# Altium PCB Main.PcbDoc (part 4 of 4)
Units mm, origin at the board's own origin, x right, y up, seen from the top; angles counter-clockwise.
Board outline 180 x 80 mm, 4 copper layers (L1_TOP, L2_GND, L3_PWR, L4_BOT), stack 1.447 mm thick; 236 components, 173 nets, 792 pads, 473 vias.
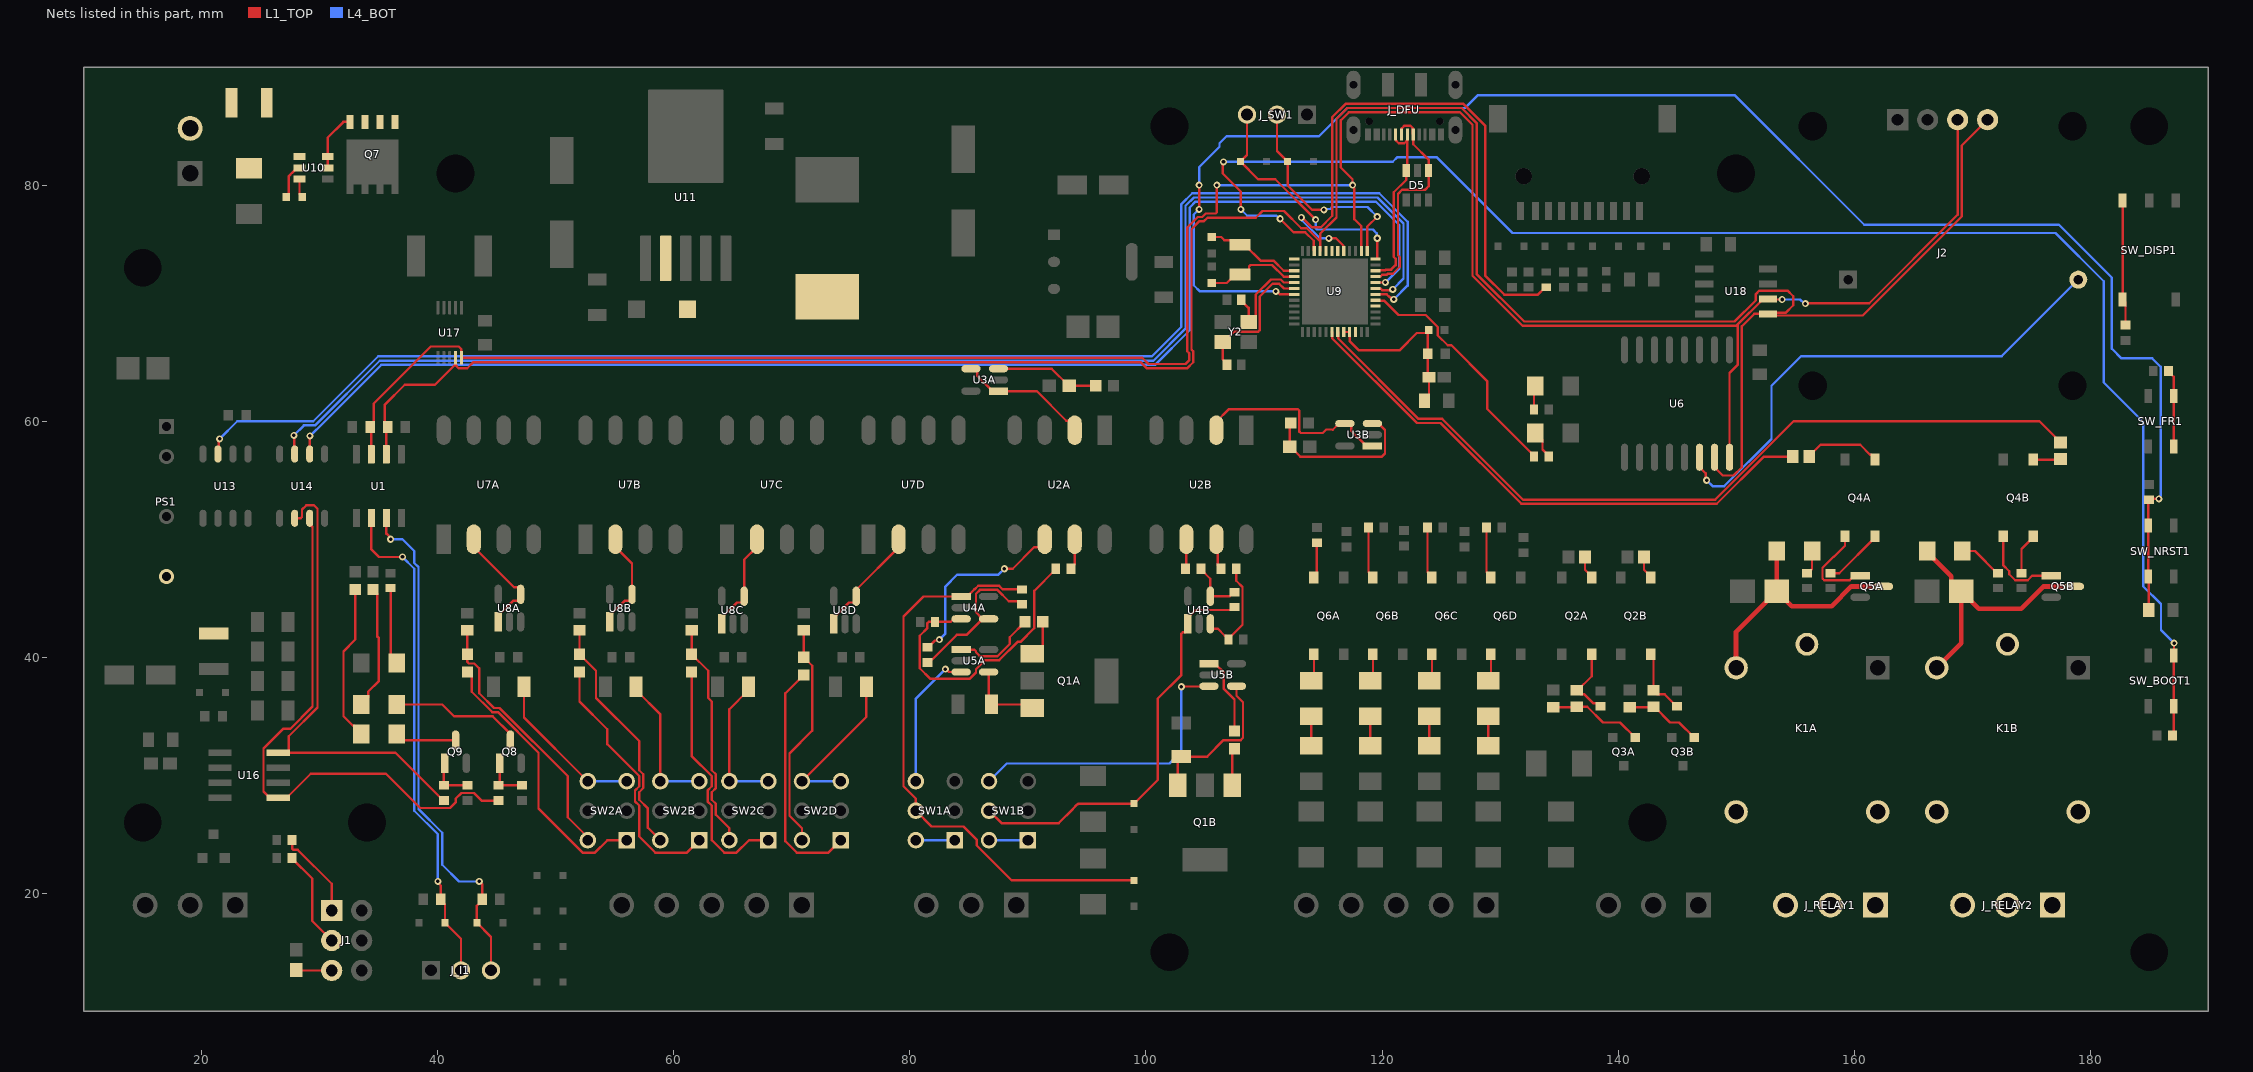
[diagram p5: the nets of this part, all layers, seen from the top]

## Via types
v1: diameter 0.6, hole 0.3, L1_TOP to L4_BOT, 473 vias

## Nets (pads, with @x,y where several pads share a name; then routed paths per layer and width w, separated by ;. In a path a pad name is that pad's centre, name@x,y a point inside that pad or via, vN(x,y) a via of type N, cw(c..) or ccw(c..) an arc to the next point about the centre after c; other vN are vias at no path point) (continued)
I2C_SCL: J2.3 R4.1 U1.3 U6.16 U9.38 U17.5 U18.6 | length 207.1
  L1_TOP w0.2: U1.3@34.365,57.2 34.365,59.385 R4.1@34.25,59.5 34.55,59.8 34.55,61.477 39.401,66.328 41.766,66.328 41.975,66.119 41.975,65.4 U17.5@42,65.375 99.675,65.375 100.204,64.846 103.359,64.846 103.654,65.141 103.654,65.771 103.5,65.925 103.5,76.41 104.392,77.302 104.771,77.302 105.065,77.596 105.883,77.596 106,77.713 v1(106,80) ; U9.38@118.25,74.435 118.25,76.52 117.647,77.123 117.647,79.744 117.5,79.892 117.5,80.5 116.5,81.5 116.5,85.493 117.194,86.187 126.606,86.187 127.668,85.126 127.668,72.332 131.903,68.097 150.047,68.097 150.132,68.182 ; U6.16@149.445,57.8 149.445,64.087 150.132,64.774 150.132,68.182 ; v1(153.896,70.313) 152.263,70.313 150.132,68.182 ; v1(155.878,69.967) 155.91,70 161.278,70 168.77,77.492 J2.3@168.77,85.55
  L4_BOT w0.2: v1(106,80) v1(117.5,80) ; v1(153.896,70.313) 155.424,70.313 155.769,69.967 v1(155.878,69.967)
I2C_SDA: J2.4 R3.1 U1.2 U6.15 U9.45 U17.4 U18.5 | length 217.4
  L1_TOP w0.2: U1.2@35.635,57.2 R3.1@35.635,59.385 ; R3.1@35.75,59.5 35.507,59.743 35.507,61.411 37.186,63.091 39.756,63.091 41.475,64.81 41.475,65.35 U17.4@41.5,65.375 ; U17.4@41.525,64.812 41.525,64.72 41.756,64.489 42.489,64.489 43.009,65.009 99.533,65.009 100.046,64.496 103.509,64.496 104.004,64.991 104.004,65.916 103.85,66.07 103.85,76.265 104.537,76.952 104.916,76.952 105.21,77.246 109.305,77.246 109.871,77.812 111.688,77.812 113.15,76.35 113.645,76.35 113.995,76 114,76 114.75,75.25 U9.45@114.75,74.435 ; 114.767,75.25 114.767,75.893 116.139,77.265 116.139,85.627 117.049,86.537 126.751,86.537 128.018,85.271 128.018,72.477 132.048,68.447 149.877,68.447 151.675,70.244 151.675,70.769 151.97,71.064 154.36,71.064 154.84,70.584 154.84,69.822 154.218,69.2 152.805,69.2 U18.5@152.7,69.095 ; U6.15@148.175,56.95 148.175,56.1 148.873,55.402 149.781,55.402 150.482,56.103 150.482,68.037 151.54,69.095 U18.5@152.7,69.095 ; J2.4@171.31,85.55 169.123,83.363 169.123,77.35 160.727,68.954 152.841,68.954 U18.5@152.7,69.095
NetBT1_2: BT1.2 U6.14 | length 43.8
  L1_TOP w0.2: U6.14@146.905,56.95 146.905,56.1 147.423,55.582 147.423,55.077 v1(147.5,55)
  L4_BOT w0.2: v1(147.5,55) 148,54.5 149,54.5 153,58.5 153,63 155.5,65.5 172.5,65.5 BT1.2@179,72
NetC5_1: C5.1 U9.3 Y1.1 | length 8.2
  L1_TOP w0.2: C5.1@105.582,75.613 106.369,75.613 106.637,75.345 107.575,75.345 Y1.1@107.975,74.945 108.375,74.945 109.735,73.585 110.834,73.585 111.669,72.75 U9.3@112.565,72.75
NetC6_1: C6.1 U9.4 Y1.2 | length 8.2
  L1_TOP w0.2: C6.1@105.582,71.713 106.843,71.713 107.575,72.445 108.326,72.445 108.726,72.845 108.726,73.118 108.843,73.235 110.689,73.235 111.674,72.25 U9.4@112.565,72.25
NetC7_1: C7.1 U9.5 Y2.3 | length 8.6
  L1_TOP w0.2: C7.1@108.073,70.296 108.073,70.221 108.692,69.602 Y2.3@108.692,68.421 108.792,68.421 109.292,68.921 109.292,70.712 110.584,72.004 111.425,72.004 111.679,71.75 U9.5@112.565,71.75
NetC8_2: C8.2 U9.6 Y2.1 | length 12
  L1_TOP w0.2: C8.2@106.873,64.796 106.873,64.871 106.492,65.252 Y2.1@106.492,66.721 106.592,66.721 107.442,67.571 109.495,67.571 109.642,67.717 109.642,70.567 110.729,71.654 111.28,71.654 111.684,71.25 U9.6@112.565,71.25
NetC16_1: C16.1 U10.5 | length 3
  L1_TOP w0.2: C16.1@27.15,79 27.375,79.225 27.375,80.779 27.663,81.067 27.667,81.067 28.067,81.467 U10.5@28.267,81.467
NetC16_2: C16.2 U10.6 | length 1.6
  L1_TOP w0.2: U10.6@28.267,80.517 28.267,79.258 28.5,79.025 C16.2@28.5,79
NetD1A_1: D1A.1 R21A.1 SW1A.5 U4A.1 | length 49.4
  L1_TOP w0.2: R21A.1@89.5,45.75 87.862,45.75 87.553,46.059 85.78,46.059 85.471,45.75 85.444,45.75 84.844,45.15 U4A.1@84.334,45.15 81.15,45.15 79.446,43.446 79.446,29.063 80.5,28.009 SW1A.5@80.5,27 81.837,25.663 84.538,25.663 85.646,24.555 85.646,24.063 88.609,21.1 D1A.1@99,21.1
NetD1B_1: D1B.1 R21B.1 SW1B.5 U4B.1 | length 35.5
  L1_TOP w0.2: SW1B.5@86.7,27 87.754,25.946 92.612,25.946 93.81,27.144 93.81,27.169 94.161,27.52 94.187,27.52 94.266,27.6 D1B.1@99,27.6 101,29.6 101,36.5 103,38.5 103,41.997 103.117,42.115 103.341,42.115 103.55,42.324 103.55,43.344 104.206,44 107.25,44 R21B.1@107.5,44.25
NetD8_2: D8.2 R18.2 | length 2.1
  L1_TOP w0.2: R18.2@132.875,61 132.875,62.875 D8.2@133,63
NetD9_2: D9.2 R20.2 | length 2.5
  L1_TOP w0.2: D9.2@133,59 133.6,58.4 133.6,57.6 134.125,57.075 R20.2@134.125,57
NetD10_1: D10.1 F1.2 Q7.1 Q7.2 Q7.3 U10.4
NetD12_1: D12.1 L1.1 U11.2
NetD17A_2: D17A.2 D22A.1 K1A.A2 Q5A.3 | length 21.6
  L1_TOP w0.4: K1A.A2@150,39.1 150,42.15 152.6,44.75 152.6,44.8 153.4,45.6 D17A.2@153.45,45.6 153.45,48.988 D22A.1@153.438,49 ; D17A.2@153.5,45.6 154.3,44.8 154.3,44.75 154.723,44.327 158.105,44.327 159.779,46 Q5A.3@162.477,46
NetD17B_2: D17B.2 D22B.1 K1B.A2 Q5B.3 | length 23
  L1_TOP w0.4: D22B.1@166.182,49 166.182,48.9 168.232,46.85 168.232,46.4 169.032,45.6 D17B.2@169.082,45.6 ; K1B.A2@167,39.1 169.082,41.182 D17B.2@169.082,45.6 ; Q5B.3@178.659,46 176.053,46 174.158,44.105 170.577,44.105 D17B.2@169.082,45.6
NetD19_2: D19.2 R41.2 | length 6.6
  L1_TOP w0.2: R41.2@36,45.875 36,40 D19.2@36.5,39.5
NetD20_1: D20.1 Q8.3 | length 11.2
  L1_TOP w0.2: D20.1@36.5,36 40.367,36 41.367,35 44.633,35 46.14,33.493 Q8.3@46.14,32.977
NetD20_2: D20.2 R46.2 | length 10.6
  L1_TOP w0.2: D20.2@33.5,36 34.1,36.6 34.1,37.1 35,38 35,41.625 34.875,41.75 34.875,45.375 R46.2@34.5,45.75
NetD21_1: D21.1 Q9.3 | length 5.2
  L1_TOP w0.2: D21.1@36.5,33.5 37.023,32.977 Q9.3@41.5,32.977
NetD21_2: D21.2 R47.2 | length 13.3
  L1_TOP w0.2: R47.2@33,45.75 33,41.5 32,40.5 32,35 32.8,34.2 32.9,34.2 33.5,33.6 D21.2@33.5,33.5
NetD22A_2: D22A.2 R52A.1 | length 2.1
  L1_TOP w0.2: R52A.1@156,47.125 156.075,47.125 156.438,47.488 D22A.2@156.438,49
NetD22B_2: D22B.2 R52B.1 | length 3.8
  L1_TOP w0.2: D22B.2@169.182,49 170.232,49 172.107,47.125 R52B.1@172.182,47.125
NetF1_1: F1.1 J-SUPPLY1.2
NetF2_1: F2.1 PS1.7
NetJ1_1: J1.1 R23.1 | length 7.6
  L1_TOP w0.2: R23.1@27.65,24.5 27.65,23.792 27.767,23.675 28.129,23.675 31,20.804 J1.1@31,18.54
NetJ1_3: J1.3 R24.1 | length 8.4
  L1_TOP w0.2: R24.1@27.65,23 27.65,22.95 29.35,21.25 29.35,17.65 J1.3@31,16
NetJ1_5: J1.5 R25.2 | length 3
  L1_TOP w0.2: R25.2@28,13.5 28.04,13.46 J1.5@31,13.46
NetJ_RELAY1_1: J_RELAY1.1 K1A.COM
NetJ_RELAY1_2: J_RELAY1.2 K1A.NC
NetJ_RELAY1_3: J_RELAY1.3 K1A.NO
NetJ_RELAY2_1: J_RELAY2.1 K1B.COM
NetJ_RELAY2_2: J_RELAY2.2 K1B.NC
NetJ_RELAY2_3: J_RELAY2.3 K1B.NO
NetQ1A_1: Q1A.1 R7A.2 | length 3.2
  L1_TOP w0.2: Q1A.1@90.35,40.3 90.6,40.3 91.25,40.95 R7A.2@91.25,43
NetQ1A_3: Q1A.3 R10A.2 U5A.4 | length 6.4
  L1_TOP w0.2: U5A.4@86.666,38.75 86.666,36.259 R10A.2@86.925,36 90.05,36 Q1A.3@90.35,35.7
NetQ1B_1: Q1B.1 R7B.2 | length 3.2
  L1_TOP w0.2: Q1B.1@107.3,29.15 107.3,32.05 R7B.2@107.5,32.25
NetQ1B_3: Q1B.3 R10B.2 U5B.4 | length 13
  L1_TOP w0.2: Q1B.3@102.7,29.15 102.7,31.275 R10B.2@103,31.575 105.177,31.575 106.577,32.975 108.029,32.975 108.225,33.171 108.225,36.186 107.666,36.744 U5B.4@107.666,37.55
NetQ2A_1: Q2A.1 R12A.2 | length 2
  L1_TOP w0.2: R12A.2@137.2,48.5 137.2,47.42 137.77,46.85 Q2A.1@137.77,46.75
NetQ2A_4: Q2A.4 R11A.2 R13A.1 | length 6.2
  L1_TOP w0.2: Q2A.4@137.77,40.25 137.77,38.395 136.575,37.2 R13A.1@136.5,37.2 136.85,36.85 137.15,36.85 137.913,36.087 138.263,36.087 R11A.2@138.5,35.85
NetQ2B_1: Q2B.1 R12B.2 | length 2
  L1_TOP w0.2: R12B.2@142.2,48.5 142.2,47.42 142.77,46.85 Q2B.1@142.77,46.75
NetQ2B_4: Q2B.4 R11B.2 R13B.1 | length 5.7
  L1_TOP w0.2: Q2B.4@142.77,40.25 143,40.02 R13B.1@143,37.2 143.35,36.85 143.95,36.85 144.95,35.85 R11B.2@145,35.85
NetQ3A_1: Q3A.1 R13A.2 R40A.1 | length 8
  L1_TOP w0.2: R40A.1@134.5,35.775 136.475,35.775 R13A.2@136.5,35.8 137.396,35.8 138.721,34.475 140.175,34.475 Q3A.1@141.45,33.2
NetQ3B_1: Q3B.1 R13B.2 R40B.1 | length 6.5
  L1_TOP w0.2: R40B.1@141,35.775 142.975,35.775 R13B.2@143,35.8 ; R13B.2@143.075,35.8 144.4,34.475 145.175,34.475 Q3B.1@146.45,33.2
NetQ4A_1: Q4A.1 R35A.2 | length 6.6
  L1_TOP w0.2: R35A.2@156.2,57 156.2,57.05 157.15,58 160.52,58 161.37,57.15 161.47,57.15 161.77,56.85 Q4A.1@161.77,56.75
NetQ4A_3: Q4A.3 Q5A.1 | length 7.8
  L1_TOP w0.2: Q4A.3@159.23,50.25 159.23,49.45 158.294,48.514 158.261,48.514 157.325,47.579 157.325,46.671 157.471,46.525 159.617,46.525 160.007,46.915 Q5A.1@160.523,46.915
NetQ4A_4: Q4A.4 R34A.2 | length 5.1
  L1_TOP w0.2: R34A.2@158,47.125 158.745,47.125 161.77,50.15 Q4A.4@161.77,50.25
NetQ4B_1: Q4B.1 R35B.2 | length 2.4
  L1_TOP w0.2: Q4B.1@175.17,56.75 177.45,56.75 R35B.2@177.5,56.8
NetQ4B_3: Q4B.3 Q5B.1 | length 7.4
  L1_TOP w0.2: Q4B.3@172.63,50.25 172.63,47.806 173.142,47.294 173.142,47.037 173.654,46.525 174.711,46.525 175.101,46.915 Q5B.1@176.706,46.915
NetQ4B_4: Q4B.4 R34B.2 | length 3.5
  L1_TOP w0.2: R34B.2@174.182,47.125 174.182,49.162 175.17,50.15 Q4B.4@175.17,50.25
NetQ6A_1: Q6A.1 R38A.2 | length 2.3
  L1_TOP w0.2: R38A.2@114,38 114.23,38.23 Q6A.1@114.23,40.25
NetQ6A_4: Q6A.4 R39A.1 | length 3.1
  L1_TOP w0.2: Q6A.4@114.23,46.75 114.479,46.999 R39A.1@114.479,49.7
NetQ6B_1: Q6B.1 R38B.2 | length 2.3
  L1_TOP w0.2: R38B.2@119,38 119.23,38.23 Q6B.1@119.23,40.25
NetQ6B_4: Q6B.4 R39B.1 | length 4.4
  L1_TOP w0.2: R39B.1@118.85,51 118.85,47.23 119.23,46.85 Q6B.4@119.23,46.75
NetQ6C_1: Q6C.1 R38C.2 | length 2.3
  L1_TOP w0.2: R38C.2@124,38 124.23,38.23 Q6C.1@124.23,40.25
NetQ6C_4: Q6C.4 R39C.1 | length 4.4
  L1_TOP w0.2: R39C.1@123.85,51 123.85,47.23 124.23,46.85 Q6C.4@124.23,46.75
NetQ6D_1: Q6D.1 R38D.2 | length 2.3
  L1_TOP w0.2: R38D.2@129,38 129.23,38.23 Q6D.1@129.23,40.25
NetQ6D_4: Q6D.4 R39D.1 | length 4.4
  L1_TOP w0.2: R39D.1@128.85,51 128.85,47.23 129.23,46.85 Q6D.4@129.23,46.75
NetQ7_4: Q7.4 U10.2 U10.3 | length 5
  L1_TOP w0.2: U10.2@30.667,81.467 U10.3@30.667,82.417 30.667,84.042 31.988,85.363 Q7.4@32.559,85.363
NetQ8_1: Q8.1 R48.1 R50.2 | length 3.9
  L1_TOP w0.2: Q8.1@45.225,31.023 45.225,29.235 R48.1@45.14,29.15 R50.2@47.14,29.15
NetQ9_1: Q9.1 R49.1 R51.2 | length 3.9
  L1_TOP w0.2: Q9.1@40.585,31.023 40.5,30.938 R49.1@40.5,29.15 R51.2@42.5,29.15
NetR5A_2: R5A.2 R6A.1 U3A.3 | length 8.9
  L1_TOP w0.2: U3A.3@87.5,64.45 92,64.45 93.45,63 R5A.2@95.75,63
NetR5B_2: R5B.2 R6B.1 U3B.3 | length 13.8
  L1_TOP w0.2: R6B.1@112.167,57.853 112.167,59.753 R5B.2@112.267,59.853 ; R6B.1@112.217,57.853 113.07,57 120,57 120.253,57.253 120.253,59.244 119.694,59.803 U3B.3@119.183,59.803
NetR7A_1: R7A.1 U5A.1 | length 7.2
  L1_TOP w0.2: U5A.1@84.334,40.65 85.453,40.65 85.597,40.506 85.597,40.418 85.925,40.091 87.408,40.091 88.45,41.133 88.45,41.7 R7A.1@89.75,43
NetR7B_1: R7B.1 U5B.1 | length 6.9
  L1_TOP w0.2: U5B.1@105.334,39.45 105.844,39.45 106.597,38.697 106.597,37.318 107.5,36.416 R7B.1@107.5,33.75
NetR8A_1: R8A.1 U2A.7 | length 2.6
  L1_TOP w0.2: R8A.1@93.65,47.5 93.65,47.55 93.96,47.86 U2A.7@93.96,50
NetR8A_2: R8A.2 R22A.1 U4A.3 | length 24.9
  L1_TOP w0.2: U4A.3@84.334,43.25 83.711,43.25 83.461,43 R22A.1@82.125,43 81.592,43 81.475,42.883 81.475,42.471 80.825,41.821 80.825,39.071 81.705,38.191 85.075,38.191 85.597,38.713 85.597,38.982 86.357,39.741 87.553,39.741 89.112,41.3 89.354,41.3 90.525,42.471 90.525,45.625 92.35,47.45 R8A.2@92.35,47.5
NetR8B_1: R8B.1 U2B.7 | length 2.7
  L1_TOP w0.2: U2B.7@105.96,50 106.075,49.885 106.075,47.775 R8B.1@106.35,47.5
NetR8B_2: R8B.2 R22B.1 U4B.3 | length 8.9
  L1_TOP w0.2: U4B.3@105.45,42.834 105.45,42.617 105.643,42.424 106.076,42.424 106.675,41.825 106.75,41.825 R22B.1@107,41.575 ; R22B.1@107,41.5 R22B.1@107,41.575 ; R8B.2@107.65,47.5 107.65,46.479 108.175,45.954 108.175,42.75 R22B.1@107,41.575
NetR9A_1: R9A.1 U2A.6 | length 16.2
  L1_TOP w0.2: R9A.1@81.5,40.85 81.55,40.85 82.123,41.423 82.423,41.423 v1(82.5,41.5) ; v1(88,47.5) 88.704,47.5 90.52,49.316 90.958,49.316 91.42,49.778 U2A.6@91.42,50
  L4_BOT w0.2: v1(82.5,41.5) 83,42 83,46 84,47 87.5,47 v1(88,47.5)
NetR9A_2: R9A.2 R21A.2 U4A.4 | length 13.6
  L1_TOP w0.2: R9A.2@81.5,39.55 81.775,39.825 81.9,39.825 83.968,41.893 84.799,41.893 U4A.4@86.156,43.25 ; U4A.4@86.666,43.25 U4A.4@86.156,43.25 ; R21A.2@89.5,44.5 89.25,44.75 88.367,44.75 87.408,45.709 85.925,45.709 85.597,45.382 85.597,43.809 U4A.4@86.156,43.25
NetR9B_1: R9B.1 U2B.6 | length 2.5
  L1_TOP w0.2: R9B.1@103.35,47.5 103.42,47.57 U2B.6@103.42,50
NetR9B_2: R9B.2 R21B.2 U4B.4 | length 4.9
  L1_TOP w0.2: R9B.2@104.65,47.5 104.65,47.45 105.45,46.65 U4B.4@105.45,45.166 107.091,45.166 107.425,45.5 R21B.2@107.5,45.5
NetR14A_1: R14A.1 SW2A.1 | length 23.8
  L1_TOP w0.2: R14A.1@42.5,38.75 42.875,38.375 42.875,37.076 44.601,35.35 45.08,35.35 48.522,31.908 48.522,27.188 52.263,23.446 53.305,23.446 54.359,24.5 SW2A.1@56,24.5
NetR14A_2: R14A.2 R15A.2 SW2A.4 | length 22.6
  L1_TOP w0.2: R15A.2@42.5,42.275 R14A.2@42.5,40.25 42.5,39.592 42.617,39.475 43.079,39.475 43.5,39.054 43.5,36.946 44.746,35.7 45.225,35.7 51,29.925 51,26.444 52.7,24.744 SW2A.4@52.7,24.5
NetR14B_1: R14B.1 SW2B.1 | length 22.4
  L1_TOP w0.2: R14B.1@52,38.75 52,36.246 54.35,33.896 54.35,32.641 57.054,29.937 57.054,29.063 56.704,28.713 56.704,27.787 57.054,27.437 57.054,24.805 58.413,23.446 61.096,23.446 SW2B.1@62.15,24.5
NetR14B_2: R14B.2 R15B.2 SW2B.4 | length 20.9
  L1_TOP w0.2: R15B.2@52,42.275 R14B.2@52,40.25 53.4,38.85 53.4,36.546 57.054,32.892 57.054,30.432 57.404,30.082 57.404,28.918 57.054,28.568 57.054,27.932 57.796,27.19 57.796,25.554 SW2B.4@58.85,24.5
NetR14C_1: R14C.1 SW2C.1 | length 20.9
  L1_TOP w0.2: R14C.1@61.5,38.75 61.5,31.641 63.204,29.937 63.204,29.063 62.854,28.713 62.854,27.787 63.204,27.437 63.204,24.505 64.263,23.446 65.305,23.446 66.359,24.5 SW2C.1@68,24.5
NetR14C_2: R14C.2 R15C.2 SW2C.4 | length 19.4
  L1_TOP w0.2: R15C.2@61.5,42.275 R14C.2@61.5,40.25 62.9,38.85 62.9,36.546 63.204,36.242 63.204,30.432 63.554,30.082 63.554,28.918 63.204,28.568 63.204,27.932 63.554,27.582 63.554,26.655 64.7,25.509 SW2C.4@64.7,24.5
NetR14D_1: R14D.1 SW2D.1 | length 20.3
  L1_TOP w0.2: R14D.1@71,38.5 69.446,36.946 69.446,24.413 70.413,23.446 73.096,23.446 SW2D.1@74.15,24.5
NetR14D_2: R14D.2 R15D.2 SW2D.4 | length 19.3
  L1_TOP w0.2: SW2D.4@70.85,24.5 70.85,25.509 69.796,26.563 69.796,31.856 71.725,33.785 71.725,39.275 R14D.2@71,40 R15D.2@71,42.275
NetR16A_1: R16A.1 SW2A.3 SW2A.6 | length 13.5
  L1_TOP w0.2: R16A.1@47.3,37.5 47.3,34.9 SW2A.6@52.7,29.5
  L4_BOT w0.2: SW2A.6@52.7,29.5 SW2A.3@56,29.5
NetR16B_1: R16B.1 SW2B.3 SW2B.6 | length 12.1
  L1_TOP w0.2: R16B.1@56.8,37.5 56.8,37.2 58.85,35.15 SW2B.6@58.85,29.5
  L4_BOT w0.2: SW2B.6@58.85,29.5 SW2B.3@62.15,29.5
NetR16C_1: R16C.1 SW2C.3 SW2C.6 | length 12
  L1_TOP w0.2: SW2C.6@64.7,29.5 64.7,35.6 66.3,37.2 R16C.1@66.3,37.5
  L4_BOT w0.2: SW2C.6@64.7,29.5 SW2C.3@68,29.5
NetR16D_1: R16D.1 SW2D.3 SW2D.6 | length 13.6
  L1_TOP w0.2: SW2D.6@70.85,29.5 76.3,34.95 R16D.1@76.3,37.5
  L4_BOT w0.2: SW2D.6@70.85,29.5 SW2D.3@74.15,29.5
NetR27_1: R27.1 SW_DISP1.3 SW_DISP1.4 | length 10.7
  L1_TOP w0.2: SW_DISP1.3@182.75,78.7 SW_DISP1.4@182.75,70.3 183,70.05 R27.1@183,68.15
NetR28_1: R28.1 SW_FR1.3 SW_FR1.4 | length 6.6
  L1_TOP w0.2: R28.1@186.65,64.236 186.65,64.186 187.075,63.761 SW_FR1.4@187.075,62.15 SW_FR1.3@187.075,57.85
NetR37A_2: R37A.2 R38A.1 | length 2.5
  L1_TOP w0.2: R37A.2@114,32.5 R38A.1@114,35
NetR37B_2: R37B.2 R38B.1 | length 2.5
  L1_TOP w0.2: R37B.2@119,32.5 R38B.1@119,35
NetR37C_2: R37C.2 R38C.1 | length 2.5
  L1_TOP w0.2: R37C.2@124,32.5 R38C.1@124,35
NetR37D_2: R37D.2 R38D.1 | length 2.5
  L1_TOP w0.2: R37D.2@129,32.5 R38D.1@129,35
NetSW1A_1: SW1A.1 SW1A.4 | length 3.3
  L4_BOT w0.2: SW1A.4@80.5,24.5 SW1A.1@83.8,24.5
NetSW1A_6: SW1A.6 U5A.3 | length 12
  L1_TOP w0.2: v1(83,39) 83.052,39 83.302,38.75 U5A.3@84.334,38.75
  L4_BOT w0.2: SW1A.6@80.5,29.5 80.5,36.5 v1(83,39)
NetSW1B_1: SW1B.1 SW1B.4 | length 3.3
  L4_BOT w0.2: SW1B.4@86.7,24.5 SW1B.1@90,24.5
NetSW1B_6: SW1B.6 U5B.3 | length 25.2
  L1_TOP w0.2: v1(103,37.5) 103.025,37.525 105.309,37.525 U5B.3@105.334,37.55
  L4_BOT w0.2: SW1B.6@86.7,29.5 88.2,31 102,31 103,32 v1(103,37.5)
NetU2A_2: U2A.2 U3A.1 U3A.4 | length 11.4
  L1_TOP w0.2: U3A.4@85.168,64.45 85.506,64.45 85.699,64.257 85.699,63.841 86.99,62.55 U3A.1@87.5,62.55 90.738,62.55 93.243,60.045 93.498,60.045 93.96,59.583 U2A.2@93.96,59.24
NetU2B_2: U2B.2 U3B.1 U3B.4 | length 17.6
  L1_TOP w0.2: U2B.2@105.96,59.24 105.96,59.96 107,61 112.883,61 113,60.883 113,59.117 113.117,59 114.974,59 115.267,59.293 115.809,59.293 115.82,59.282 116.341,59.803 U3B.4@116.851,59.803 117.189,59.803 117.382,59.61 117.382,59.194 118.673,57.903 U3B.1@119.183,57.903
NetU7A_2: U7A.2 U8A.1 U8A.4 | length 9.9
  L1_TOP w0.2: U7A.2@43.04,50 43.04,49.35 46.467,45.923 46.816,45.923 47.009,45.729 U8A.4@47.009,45.332 47.009,44.994 46.816,44.801 46.4,44.801 45.109,43.51 U8A.1@45.109,43
NetU7B_2: U7B.2 U8B.1 U8B.4 | length 8.6
  L1_TOP w0.2: U8B.1@54.55,43 54.55,43.51 55.841,44.801 56.257,44.801 56.45,44.994 U8B.4@56.45,45.332 56.45,47.94 55.04,49.35 U7B.2@55.04,50
NetU7C_2: U7C.2 U8C.1 U8C.4 | length 8.6
  L1_TOP w0.2: U8C.1@64.05,42.834 64.05,43.344 65.341,44.635 65.757,44.635 65.95,44.828 U8C.4@65.95,45.166 65.95,48.26 67.04,49.35 U7C.2@67.04,50
NetU7D_2: U7D.2 U8D.1 U8D.4 | length 9.7
  L1_TOP w0.2: U8D.1@73.55,42.834 73.55,43.344 74.841,44.635 75.257,44.635 75.45,44.828 U8D.4@75.45,45.166 75.45,45.718 79.04,49.308 U7D.2@79.04,50
NRST: C15.2 R19.2 SW_NRST1.1 SW_NRST1.2 U9.7 | length 137.8
  L1_TOP w0.2: v1(104.5,77.956) v1(104.5,80) ; v1(111,71) 111.108,71 111.358,70.75 U9.7@112.565,70.75 ; C15.2@184.975,44 184.975,46.8 SW_NRST1.1@184.925,46.85 SW_NRST1.2@184.925,51.15 184.925,53.275 R19.2@185,53.35 185.077,53.427 v1(185.832,53.427)
  L4_BOT w0.2: v1(104.5,77.956) 104.052,77.508 104.052,71.515 104.567,71 v1(111,71) ; v1(104.5,80) 104.5,81.522 106.227,83.249 106.227,83.555 106.822,84.15 114.662,84.15 117.049,86.537 127.042,86.537 128.136,87.631 149.874,87.631 160.855,76.65 177.35,76.65 181.848,72.152 181.848,66.148 182.669,65.326 185.259,65.326 185.972,64.613 185.972,53.675 185.832,53.535 v1(185.832,53.427)
PA8: U9.30 U13.3 | length 126.5
  L1_TOP w0.2: U13.3@21.365,57.225 21.432,57.293 21.432,58.432 v1(21.5,58.5) ; U9.30@119.435,70.75 120.403,70.75 120.637,70.516 120.687,70.516 120.887,70.316 v1(120.995,70.316)
  L4_BOT w0.2: v1(21.5,58.5) 23,60 29.443,60 34.943,65.5 100.5,65.5 103.002,68.002 103.002,78.396 103.916,79.31 104.118,79.31 119.757,79.31 122.171,76.897 122.171,71.492 v1(120.995,70.316)
PA9: U9.31 U14.3 | length 118.5
  L1_TOP w0.2: v1(27.8,58.807) 27.832,58.774 27.832,57.258 U14.3@27.865,57.225 ; U9.31@119.435,71.25 119.47,71.215 119.907,71.215 120.018,71.104 120.842,71.104 v1(120.908,71.17)
  L4_BOT w0.2: v1(27.8,58.807) 28.643,59.65 29.588,59.65 35.069,65.131 100.631,65.131 103.352,67.852 103.352,78.251 104.061,78.96 104.263,78.96 119.612,78.96 121.821,76.752 121.821,72.083 v1(120.908,71.17)
PA10: U9.32 U14.2 | length 115.2
  L1_TOP w0.2: U14.2@29.135,57.225 29.145,57.235 29.145,58.742 v1(29.156,58.753) ; U9.32@119.435,71.75 119.439,71.754 120.285,71.754 v1(120.289,71.758)
  L4_BOT w0.2: v1(29.156,58.753) 29.703,59.3 29.733,59.3 35.205,64.772 100.772,64.772 103.702,67.702 103.702,78.106 104.206,78.61 119.467,78.61 121.471,76.607 121.471,72.94 v1(120.289,71.758)
PA11: D5.1 J_DFU.5 J_DFU.7 U9.33 | length 18.6
  L1_TOP w0.2: U9.33@119.435,72.25 119.47,72.285 119.891,72.285 120.018,72.412 120.412,72.412 120.496,72.496 120.916,72.496 121.504,73.084 121.504,73.916 121.35,74.07 121.35,79.254 121.721,79.624 123.67,79.624 123.95,79.904 D5.1@123.95,81.25 123.95,82.167 122.65,83.467 J_DFU.5@122.65,84.3 122.615,84.335 122.615,84.824 122.389,85.05 121.911,85.05 121.685,84.824 121.685,84.335 J_DFU.7@121.65,84.3
PA12: D5.3 J_DFU.6 J_DFU.8 U9.34 | length 15.2
  L1_TOP w0.2: U9.34@119.435,72.75 119.47,72.785 120.285,72.785 120.346,72.846 120.771,72.846 121.154,73.229 121.154,73.771 121,73.925 121,79.399 122.05,80.449 D5.3@122.05,81.25 122.15,81.35 122.15,83.776 ; J_DFU.8@121.15,84.3 121.185,84.265 121.185,83.776 121.411,83.55 121.889,83.55 122.115,83.776 122.115,84.265 J_DFU.6@122.15,84.3
PA13: D6.1 J_SW1.3 U9.36 | length 21.2
  L1_TOP w0.2: J_SW1.3@108.56,85.979 108.56,82.56 D6.1@108,82 109.5,80.5 110.949,80.5 v1(114.369,77.08) ; U9.36@119.435,73.75 119.695,73.75 119.627,73.75 119.592,73.785 v1(119.592,75.501)
  L4_BOT w0.2: v1(114.369,77.08) 114.369,76.36 114.486,76.243 119.227,76.243 119.557,75.914 119.557,75.537 v1(119.592,75.501)
PA14: D7.1 J_SW1.2 U9.37 | length 18.5
  L1_TOP w0.2: J_SW1.2@111.1,85.979 111.1,82.9 D7.1@112,82 112,80 114.091,77.909 v1(115.066,77.909) ; U9.37@118.75,74.435 118.75,76.488 v1(119.594,77.332)
  L4_BOT w0.2: v1(115.066,77.909) 115.142,77.986 115.605,77.986 115.766,78.147 117.722,78.147 117.729,78.154 118.771,78.154 v1(119.594,77.332)
PB1: R35A.1 U9.18 | length 47
  L1_TOP w0.2: U9.18@115.749,67.564 115.785,67.527 115.785,67.015 122.95,59.85 124.957,59.85 131.807,53 148.369,53 152.369,57 R35A.1@154.8,57
PB2: R35B.1 U9.19 | length 71
  L1_TOP w0.2: U9.19@116.25,67.565 116.285,67.53 116.285,67.01 123.095,60.2 125.102,60.2 131.952,53.35 148.224,53.35 154.874,60 175.7,60 177.05,58.65 177.05,58.6 177.45,58.2 R35B.1@177.5,58.2
PB3: R33.1 U9.41 | length 49.8
  L1_TOP w0.2: v1(113.164,77.261) 113.229,77.261 114.064,76.426 114.805,76.426 115.789,77.41 115.789,85.772 116.904,86.887 126.896,86.887 128.735,85.048 128.735,72.351 130.361,70.725 133.205,70.725 133.83,71.35 R33.1@133.93,71.35 ; v1(115.5,75.5) 116.104,75.5 116.715,74.889 116.715,74.47 U9.41@116.75,74.435
  L4_BOT w0.2: v1(113.164,77.261) 113.241,77.184 113.241,76.993 114.734,75.5 v1(115.5,75.5)
PB4: U9.42
PB5: U9.43
PB6: U9.44
PB8_BOOT0: R17.2 SW_BOOT1.3 SW_BOOT1.4 U9.46 | length 133
  L1_TOP w0.2: v1(106.565,81.982) 106.5,81.917 106.5,81 108.036,79.464 v1(108.036,77.956) ; v1(111.366,77.158) 112.525,76 113.5,76 114.215,75.285 114.215,74.47 U9.46@114.25,74.435 ; R17.2@186.977,33.35 187.075,33.449 SW_BOOT1.3@187.075,35.85 SW_BOOT1.4@187.075,40.15 187.109,40.184 v1(187.109,41.205)
  L4_BOT w0.2: v1(106.565,81.982) 120.907,81.982 121.306,82.381 124.624,82.381 131.055,75.95 177.06,75.95 181.148,71.863 181.148,63.28 184.5,59.928 184.5,46 186,44.5 186,42.314 v1(187.109,41.205) ; v1(108.036,77.956) 108.577,77.415 111.049,77.415 111.305,77.158 v1(111.366,77.158)
PB10: U9.22
PB15: U9.28
PC6: R20.1 U9.29 | length 20.8
  L1_TOP w0.2: U9.29@119.435,70.25 119.463,70.222 120.165,70.222 121.383,69.004 123.703,69.004 124.723,67.984 124.723,67.277 125.569,66.43 125.877,66.43 128.901,63.406 128.901,61.049 132.875,57.075 R20.1@132.875,57
RX: R49.2 U14.6 U16.4 | length 40.4
  L1_TOP w0.2: U16.4@26.464,31.905 U16.4@27.188,31.905 ; U14.6@27.865,51.775 28.371,51.775 28.488,51.892 28.488,52.513 28.858,52.883 29.498,52.883 29.796,52.585 29.796,35.748 27.354,33.306 27.354,32.072 U16.4@27.188,31.905 ; R49.2@40.5,27.85 40.45,27.85 36.395,31.905 U16.4@27.188,31.905
SCL2: D24.1 J_I1.2 R1.1 U1.6 | length 42.5
  L1_TOP w0.2: U1.6@34.365,51.8 34.365,49.135 35,48.5 v1(37,48.5) ; v1(40,21) 40,20.892 40.25,20.642 R1.1@40.25,19.5 ; R1.1@40.25,19.4 40.6,19.05 D24.1@40.6,17.5 41.953,16.147 J_I1.2@41.953,13.47
  L4_BOT w0.2: v1(37,48.5) 38,47.5 38,27 40,25 v1(40,21)
SDA2: D23.1 J_I1.3 R2.1 U1.7 | length 44
  L1_TOP w0.2: U1.7@35.635,51.8 35.635,50.473 36,50.108 v1(36,50) ; v1(43.5,21) 43.75,20.75 R2.1@43.75,19.5 43.75,19.4 43.3,18.95 D23.1@43.3,17.5 44.493,16.307 J_I1.3@44.493,13.47
  L4_BOT w0.2: v1(36,50) 37,50 38,49 38,47.995 38.35,47.645 38.35,27.15 40.37,25.13 40.37,22.421 41.791,21 v1(43.5,21)
TX: R48.2 U14.7 U16.1 | length 48.5
  L1_TOP w0.2: U14.7@29.135,51.775 29.135,51.272 29.374,51.033 29.374,35.821 27.482,33.928 26.876,33.928 25.223,32.275 25.223,28.612 25.74,28.095 U16.1@26.464,28.095 27.188,28.095 29.22,30.127 35.606,30.127 38.508,27.225 41.029,27.225 41.5,27.696 41.5,28.004 41.996,28.5 43.056,28.5 43.706,27.85 R48.2@45.14,27.85
VBAT: U9.1
VREF+: C12.1 C13.1 C14.1 FB1.2 U9.20 U9.21 | length 15.1
  L1_TOP w0.2: U9.20@116.75,67.565 U9.21@117.25,67.565 117.25,66.794 118.044,66 121.469,66 122.949,67.48 123.723,67.48 FB1.2@123.873,67.63 ; C14.1@123.598,61.73 123.598,61.855 123.982,62.24 C13.1@123.982,63.73 123.873,63.84 C12.1@123.873,65.73 FB1.2@123.873,67.63 ; FB1.2@123.948,67.73 123.948,67.705 FB1.2@123.873,67.63
pads on no net: D5.4 D5.5 D5.6 J2.15 J3. J3.P1 J3.P8 J3.WP J_DFU. J_DFU.2 J_DFU.3 J_DFU.4 J_DFU.9 J_DFU.10 J_DFU.11 U6.1 U6.3 U6.5 U6.6 U6.7 U6.8 U6.9 U6.10 U6.11 U6.12 U13.2 U17.3

## Polygon pours and split planes (outlines as drawn)
5V_ISO_GND on L1_TOP "NETF1_1" (solid, pour order 81): 153.5,51.5 148.5,46.5 148.5,42.5 147,41 111,41 110,42 110,51.5 109,52.5 10,52.5 10,10 190,10 190,28 181.5,28 180,29.5 180,50 178.5,51.5
GND on L1_TOP "NETF1_1" (solid, pour order 80): 151.629,55.484 144,47.856 144,46.5 143,45.5 114,45.5 113.5,46 113.5,55 111.999,56.501 38.83,56.485 10,56.485 10,90 190,90 190,32 184.5,32 183.5,33 183.5,54.5 183.484,54.5 182.5,55.484
AOUT_CURRENTA on L1_TOP "NETF1_1" (solid, pour order 24): 101.5,46.5 102,46 102,38.5 100,36.5 100,32 99.5,31.5 92,31.5 91.604,31.896 91.604,36.996 89.096,36.996 89.096,39.004 91.604,39.004 91.604,46.104 92,46.5
AOUT_CURRENTB on L1_TOP "NETF1_1" (solid, pour order 23): 111,11.5 110.5,11 103.5,11 100,14.5 100,26 100.689,26.689 102.789,26.689 103.996,27.896 103.996,30.404 106.004,30.404 106.004,27.896 110.604,27.896 111,27.5
NetJ_RELAY2_2 on L1_TOP "NETF1_1" (solid, pour order 32): 181,24 180.5,23.5 177,23.5 174.5,21 174.5,17.5 174,17 172,17 171.5,17.5 171.5,26.5 174.5,29.5 180.5,29.5 181,29
NetJ_RELAY2_3 on L1_TOP "NETF1_1" (solid, pour order 54): 165.5,29.5 165,29 165,23 167.5,20.5 167.5,17.5 168,17 170,17 170.5,17.5 170.5,27.5 168.5,29.5
NetJ_RELAY1_3 on L1_TOP "NETF1_1" (solid, pour order 55): 148.5,29.5 148,29 148,23.5 151.5,20 151.5,17.5 152,17 155,17 155.5,17.5 155.5,25.5 151.5,29.5
NetJ_RELAY1_2 on L1_TOP "NETF1_1" (solid, pour order 59): 156.5,17.5 157,17 159,17 159.5,17.5 159.5,21.5 163.5,25.5 163.5,29.5 163,30 160,30 156.5,26.5
5V_ISO on L1_TOP "NETF1_1" (solid, pour order 79): 24,34.5 24.5,34 25.5,34 25.5,44.5 24.5,44.5 24,44 24,40.5 23.5,40 19,40 18,41 15.5,41 15,40.5 15,34.5 15.5,34 20.5,34 21,34.5 21,37.5 21.5,38 22,38 22.5,38.5 23.5,38.5 24,38
NetF2_1 on L1_TOP "NETF1_1" (solid, pour order 77): 15,46 15.5,45.5 17.5,45.5 19.5,43.5 19.5,41 22.5,41 22.5,44.5 18.5,48.5 15.5,48.5 15,48
5V on L1_TOP "NETF1_1" (solid, pour order 72): 15,65.5 15.5,66 18.5,66 20.5,64 20.5,60.5 18.5,58.5 15.5,58.5 15,59
NetF1_1 on L1_TOP "NETF1_1" (solid, pour order 71): 17,83.5 17.5,83 20.5,83 21.5,84 21.5,85 22,85.5 23.5,85.5 23.5,88.5 18,88.5 17,87.5
3V3 on L1_TOP "NETF1_1" (solid, pour order 69): 95.5,81 95.5,81.5 93,84 93,88.5 93.5,89 102.5,89 102.5,72 102,71.5 96.5,71.5 95.5,72.5 92,72.5 91.5,73 91.5,74 92,74.5 95,74.5 95.5,75
NetD12_1 on L1_TOP "NETF1_1" (solid, pour order 63): 78.5,73 79,72.5 79,68.5 78.5,68 60.5,68 60,68.5 60,70.5 58.5,72 58.5,76 60,76 60,72 61,71 69,71 69.5,71.5 69.5,72.5 70,73
NetD10_1 on L1_TOP "NETF1_1" (solid, pour order 62): 22.5,85.5 22,85 22,80.5 26,80.5 26,81 27,82 29,82 29,84.5 31.5,86.5 33,86.5 33.5,86 33.5,84.5 37,84.5 37,88 36.5,88.5 24.5,88.5 24.5,85.5
GND on L1_TOP "PGND_Buck_Pour" (solid, pour order 65): 57.5,71 58,70.5 58,68 57.5,67.5 48,67.5 47.5,68 47.5,78.5 52.5,78.5 52.5,71.5 53,71
5V on L1_TOP "NETF1_1" (solid, pour order 68): 88,66.5 88.5,66 95,66 95.5,66.5 95.5,69.5 93,72 91.5,72 91,72.5 91,83 88.5,85.5 67.5,85.5 67,85 67,79 67.5,78.5 88.5,78.5 89,79 89.5,78.5 89.5,72.5 88,71
GND on L1_TOP "NETF1_1" (solid, pour order 67): 88.5,78 89,77.5 89,74 88.5,73.5 69.5,73.5 69,73 69,72 68.5,71.5 64,71.5 63.5,72 63.5,75.5 64,76 79.5,76 80,76.5 80,77.5 80.5,78
GND on L1_TOP "NETF1_1" (solid, pour order 66): 60.5,72 60.5,80.5 61.5,80.5 61.5,72
24V_PREMEASURE on L1_TOP "NETF1_1" (solid, pour order 61): 32,84 37,84 37,77 38,76 39,76 39,72 35.5,72 32,75.5 32,76.5 32,77
24V on L1_TOP "NETF1_1" (solid, pour order 60): 43,72.5 43.5,72 47,72 47.5,72.5 47.5,78.5 52.5,78.5 52.5,72 53,71.5 58,71.5 58.5,72 58.5,75.5 58,76 55.5,76 55,76.5 55,83.5 54.5,84 43,84
AOUT_CURRENTB on L4_BOT "NETF1_1" (solid, pour order 76): 85.5,21.5 86,21 96,21 100,17 100,14.5 103.5,11 110.5,11 111,11.5 111,40 109.5,41.5 109.5,51.5 109,52 100.274,52 99.791,51.5 99.783,51.5 99.783,31 99.283,30.5 86,30.5 85.5,30
5V_ISO_GND on L4_BOT "NETF1_1" (solid, pour order 88): 153.5,51.5 148.5,46.5 148.5,42.5 147,41 111,41 110,42 110,51.5 109,52.5 10,52.5 10,10 190,10 190,28 181.5,28 180,29.5 180,50 178.5,51.5
NetJ_RELAY2_1 on L4_BOT "NETF1_1" (solid, pour order 78): 175,17.5 175.5,17 178,17 178.5,17.5 178.5,21 175.5,24 175.5,42.5 175,43 170.5,43 170,42.5 170,25 175,20
NetJ_RELAY1_1 on L4_BOT "NETF1_1" (solid, pour order 84): 164,17.5 163.5,17 160.5,17 160,17.5 160,20.5 153.5,27 153.5,42.5 154,43 158,43 158.5,42.5 158.5,26.5 164,21
GND on L4_BOT "NETF1_1" (solid, pour order 86): 151.629,55.484 144,47.856 144,46.5 143,45.5 114,45.5 113.5,46 113.5,55 111.999,56.501 38.83,56.485 10,56.485 10,90 190,90 190,32 184.5,32 183.5,33 183.5,54.5 183.484,54.5 182.5,55.484
AOUT_CURRENTA on L4_BOT "NETF1_1" (solid, pour order 22): 85.5,31 85,30.5 85,22 85,21.75 84.25,21 83.5,21 83,20.5 83,17.5 82.5,17 78.5,17 77,17 76.5,17.5 76.5,32.5 78.5,34.5 78.5,46 79.5,47 88,47 87,48 87,51.5 87.5,52 99,52 99.5,51.5 99.5,46.5 101.5,46.5 101.683,46.683 102,46.366 102,38.5 100,36.5 100,32 99,31
AOUT_CURRENTA on L2_GND "NETF1_1" (solid, pour order 73): 101.5,46.5 102,46 102,38.5 100,36.5 100,32 99.5,31.5 92,31.5 91.604,31.896 91.604,36.996 89.096,36.996 89.096,39.004 91.604,39.004 91.604,46.104 92,46.5
AOUT_CURRENTB on L2_GND "NETF1_1" (solid, pour order 75): 111,11.5 110.5,11 103.5,11 100,14.5 100,26 100.689,26.689 102.789,26.689 103.996,27.896 103.996,30.404 106.004,30.404 106.004,27.896 110.604,27.896 111,27.5
5V_ISO_GND on L2_GND "NETF1_1" (solid, pour order 82): 153.5,51.5 148.5,46.5 148.5,42.5 147,41 111,41 110,42 110,51.5 109,52.5 10,52.5 10,10 190,10 190,28 181.5,28 180,29.5 180,50 178.5,51.5
GND on L2_GND "NETF1_1" (solid, pour order 83): 151.629,55.484 144,47.856 144,46.5 143,45.5 114,45.5 113.5,46 113.5,55 111.999,56.501 38.83,56.485 10,56.485 10,90 190,90 190,32 184.5,32 183.5,33 183.5,54.5 183.484,54.5 182.5,55.484
5V on L3_PWR (split plane): 90.498,72.5 90.507,72.402 90.536,72.308 90.582,72.221 90.645,72.145 91.145,71.645 91.221,71.582 91.308,71.536 91.402,71.507 91.5,71.498 92.792,71.498 94.998,69.292 94.998,66.708 94.292,66.002 49,66.002 48.902,65.993 48.808,65.964 48.721,65.918 48.645,65.855 46.792,64.002 22.5,64.002 22.402,63.993 22.308,63.964 22.221,63.918 22.145,63.855 20.645,62.355 20.582,62.279 20.536,62.192 20.507,62.098 20.498,62 20.498,61.5 20.498,60.5 20.498,60.208 18.645,58.355 18.582,58.279 18.536,58.192 18.507,58.098 18.498,58 18.498,57.002 10.51,57.002 10.51,72.498 30.292,72.498 32.645,70.145 32.721,70.082 32.808,70.036 32.902,70.007 33,69.998 36.292,69.998 38.145,68.145 38.221,68.082 38.308,68.036 38.402,68.007 38.5,67.998 41,67.998 41.098,68.007 41.192,68.036 41.279,68.082 41.355,68.145 41.855,68.645 41.918,68.721 41.964,68.808 41.993,68.902 42.002,69 42.002,70.292 42.208,70.498 66,70.498 66.098,70.507 66.192,70.536 66.279,70.582 66.355,70.645 67.355,71.645 67.418,71.721 67.464,71.808 67.493,71.902 67.502,72 67.502,89.49 90.498,89.49
24V_PREMEASURE on L3_PWR (split plane): 40.998,70.5 40.998,69.208 40.792,69.002 38.708,69.002 36.855,70.855 36.779,70.918 36.692,70.964 36.598,70.993 36.5,71.002 33.208,71.002 30.855,73.355 30.779,73.418 30.692,73.464 30.598,73.493 30.5,73.502 10.51,73.502 10.51,89.49 40.998,89.49
5V_ISO on L3_PWR (split plane): 109.498,51.292 109.498,41.5 109.507,41.402 109.536,41.308 109.582,41.221 109.645,41.145 109.721,41.082 109.808,41.036 109.902,41.007 110,40.998 147.5,40.998 147.598,41.007 147.692,41.036 147.779,41.082 147.855,41.145 148.855,42.145 148.918,42.221 148.964,42.308 148.993,42.402 149.002,42.5 149.002,46.292 153.708,50.998 178.292,50.998 179.498,49.792 179.498,29.5 179.507,29.402 179.536,29.308 179.582,29.221 179.645,29.145 181.145,27.645 181.221,27.582 181.308,27.536 181.402,27.507 181.5,27.498 189.49,27.498 189.49,10.51 10.51,10.51 10.51,51.498 109.292,51.498
24V on L3_PWR (split plane): 66.498,72.208 65.792,71.502 42.002,71.502 42.002,89.49 66.498,89.49
3V3 on L3_PWR (split plane): 189.49,32.502 184.708,32.502 184.002,33.208 184.002,54.5 183.993,54.598 183.964,54.692 183.918,54.779 183.855,54.855 182.855,55.855 182.779,55.918 182.692,55.964 182.598,55.993 182.5,56.002 151.5,56.002 151.402,55.993 151.308,55.964 151.221,55.918 151.145,55.855 143.645,48.355 143.582,48.279 143.536,48.192 143.507,48.098 143.498,48 143.498,46.708 142.792,46.002 114.002,46.002 114.002,55 113.993,55.098 113.964,55.192 113.918,55.279 113.855,55.355 112.355,56.855 112.279,56.918 112.192,56.964 112.098,56.993 112,57.002 19.502,57.002 19.502,57.792 21.355,59.645 21.418,59.721 21.464,59.808 21.493,59.902 21.502,60 21.502,60.5 21.502,61.5 21.502,61.792 22.708,62.998 47,62.998 47.098,63.007 47.192,63.036 47.279,63.082 47.355,63.145 49.208,64.998 94.5,64.998 94.598,65.007 94.692,65.036 94.779,65.082 94.855,65.145 95.855,66.145 95.918,66.221 95.964,66.308 95.993,66.402 96.002,66.5 96.002,69.5 95.993,69.598 95.964,69.692 95.918,69.779 95.855,69.855 93.355,72.355 93.279,72.418 93.192,72.464 93.098,72.493 93,72.502 91.708,72.502 91.502,72.708 91.502,89.49 189.49,89.49

## Keep-outs
Keep-Out Layer:
  circle w0.254: c34,26 r3.5
  circle w0.254: c41.5,81 r3.5
  circle w0.254: c102,85 r3.5
  circle w0.254: c102,15 r3.5
  circle w0.254: c142.5,26 r3.5
  circle w0.254: c150,81 r3.5
  circle w0.254: c185,85 r3.5
  circle w0.254: c185,15 r3.5
  circle w0.254: c15,73 r3.5
  circle w0.254: c15,26 r3.5
  pour cut-out: 31.53,28.571 34,29.5 36.465,28.571 37.5,26 36.465,23.477 34,22.5 31.37,23.477 30.5,26
  pour cut-out: 39.015,83.536 41.485,84.464 43.949,83.536 44.985,80.964 43.949,78.441 41.485,77.464 38.855,78.441 37.985,80.964
  pour cut-out: 182.53,17.571 185,18.5 187.465,17.571 188.5,15 187.465,12.477 185,11.5 182.37,12.477 181.5,15
  pour cut-out: 182.53,87.571 185,88.5 187.465,87.571 188.5,85 187.465,82.477 185,81.5 182.37,82.477 181.5,85
  pour cut-out: 147.53,83.571 150,84.5 152.465,83.571 153.5,81 152.465,78.477 150,77.5 147.37,78.477 146.5,81
  pour cut-out: 140.03,28.571 142.5,29.5 144.965,28.571 146,26 144.965,23.477 142.5,22.5 139.87,23.477 139,26
  pour cut-out: 99.53,17.571 102,18.5 104.465,17.571 105.5,15 104.465,12.477 102,11.5 99.37,12.477 98.5,15
  pour cut-out: 12.53,28.571 15,29.5 17.465,28.571 18.5,26 17.465,23.477 15,22.5 12.37,23.477 11.5,26
  pour cut-out: 12.53,75.571 15,76.5 17.465,75.571 18.5,73 17.465,70.477 15,69.5 12.37,70.477 11.5,73
  pour cut-out: 99.53,87.571 102,88.5 104.465,87.571 105.5,85 104.465,82.477 102,81.5 99.37,82.477 98.5,85

## Other copper
L1_TOP:
L3_PWR (plane layer: these items are gaps in the copper):
  region: 190,28 181.5,28 180,29.5 180,50 178.5,51.5 153.5,51.5 148.5,46.5 148.5,42.5 147,41 111,41 110,42 110,51.5 109.5,52 10,52 10,56.5 112,56.5 113.75,54.75 113.75,45.75 114,45.5 143,45.5 144,46.5 144,48 151.5,55.5 182.5,55.5 184,54 184,33 184.5,32.5 185,32 190,32
  lines w1: 10,52.5 10.5,52 109.5,52 110,51.5 110,41.5 147.5,41.5 148.5,42.5 148.5,46.5 153.5,51.5 178.5,51.5 180,50 180,29.5 181.5,28 190,28 ; 10,73 30.5,73 33,70.5 36.5,70.5 38.5,68.5 41,68.5 41.5,69 41.5,70.5 ; 10.5,56.5 112,56.5 113.5,55 113.5,46 ; 19,56.5 19,58 21,60 21,60.5 21,61.5 21,62 22.5,63.5 47,63.5 49,65.5 94.5,65.5 95.5,66.5 95.5,69.5 93,72 91.5,72 91,72.5 91,90 ; 41.5,90 41.5,70.5 ; 67,90 67,72 66,71 42,71 41.5,70.5 ; 114,45.5 143,45.5 144,46.5 144,48 151.5,55.5 182.5,55.5 183.5,54.5 183.5,33 184.5,32 190,32

## Silkscreen, mask and mechanical layers (free items; w line width, h text height)
Top Overlay:
  drawing of 21 lines, arcs and shapes, not listed
  text "+" at 17.763,87.5 h1.52
  text "DIO CLK GND" at 105.303,85.784 h0.9
  text "SSD1315" at 149.951,83.389 h1
  text "PPTC" at 21.157,82.5 h1
  text "SWD" at 108.202,82.234 h1
  text "-" at 17.763,77 h1.52
  text "24V" at 18.663,74.5 h1.52
  text "MENU" at 190,71.591 h1 r90
  text "DarcyJProjects" at 20.395,70 h1.52
  text "EMBEDDED / CONTROLLER" at 22.343,65.578 h1.25
  text "STM32" at 113.157,64 h1
  text "By Darcy" at 23.5,63.5 h0.8
  text "v1.194" at 27.814,63.5 h0.8
  text "POWER" at 130.814,63.5 h0.8
  text "2025/2026" at 25.286,62 h0.8
  text "CR2032" at 174.64,58.284 h1
  text "darcyjprojects.xyz" at 154.501,58 h1.3
  text "FR" at 190,57.157 h1 r90
  text "STATUS" at 132.5,54 h0.8
  text "NRST" at 190,46.157 h1 r90
  text "PPTC" at 18.157,42 h1
  text "ISO POWER" at 32,40 h0.8
  text "BOOT" at 190,35.157 h1 r90
  text "TX" at 30.5,34.5 h0.8
  text "VOLTAGE / CURRENT MODE" at 52.25,32.389 h1
  text "RX" at 30.5,32 h0.8
  text "I" at 75.5,27.889 h1.5
  text "V" at 75.5,22.889 h1.5
  text "NO   NC  COM" at 152.078,19.45 h0.9
  text "NO   NC  COM" at 167.078,19.45 h0.9
  text "TERM" at 29.261,19.287 h1
  text "Relays: / 50VAC MAX / NO MAINS" at 178.085,19 h1.25
  text "A    B   GND" at 13.578,18.95 h0.9
  text "1    2    3    4   GND" at 53.373,18.95 h0.9
  text "1    2   GND" at 79.078,18.95 h0.9
  text "1     2    3    4   GND" at 111.373,18.95 h0.9
  text "1    2   GND" at 137.578,18.95 h0.9
  text "I2C [5V]" at 38.027,14.023 h1
  text "RS485" at 13,11 h1 r90
  text "DOUT" at 151.5,10.157 h1 r90
  text "AOUT" at 91.645,10.03 h1
  text "AIN" at 73.5,10 h1
  text "DIN" at 131.5,10 h1
  text "GND SCL SDA" at 36.078,8.45 h0.9
Bottom Overlay:
  drawing of 6 lines, arcs and shapes, not listed
  text "2025-26" at 102.217,75.1 h1
  text "v1.194" at 106.714,75.1 h1
  text "DarcyJProjects" at 110.214,69.747 h2
  text "PROTOTYPE REV. 2" at 110.214,67.544 h1.52
Mechanical 1:
  the board outline again, w0.254
Board Outline:
  the board outline again, w0.254

## Text inside footprints (layer, text, board x,y; h text height)
BT1: Top Overlay "+" at 176.612,71.238 h1.52; Top Overlay "-" at 157.181,71.238 h1.52; Top Overlay "CR2032" at 164.039,71.238 h1.52
J_DFU: Top 3D Body "PCB EDGE" at 116.4,90.15 h0.61 r180